# Altium PCB PCB1.PcbDoc
Units mil, origin at the board's own origin, x right, y up, seen from the top; angles counter-clockwise.
Board outline 885 x 605 mil, 2 copper layers (Top Layer, Bottom Layer); 2 components, 8 nets, 20 pads, 0 vias.
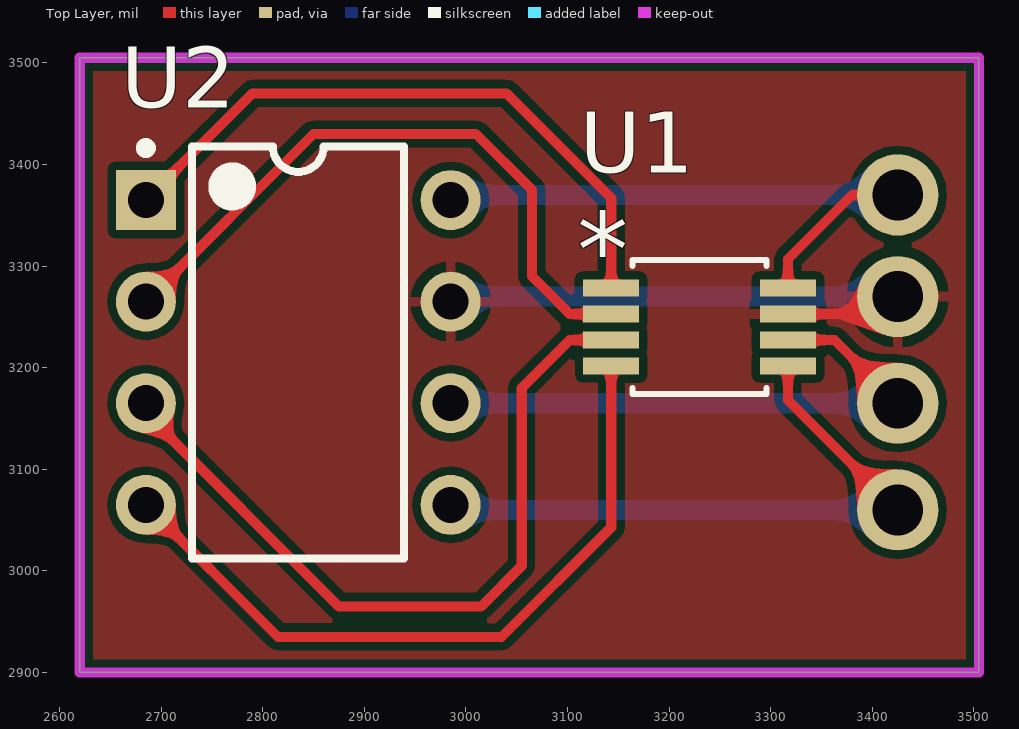
[diagram p0: Top Layer view]
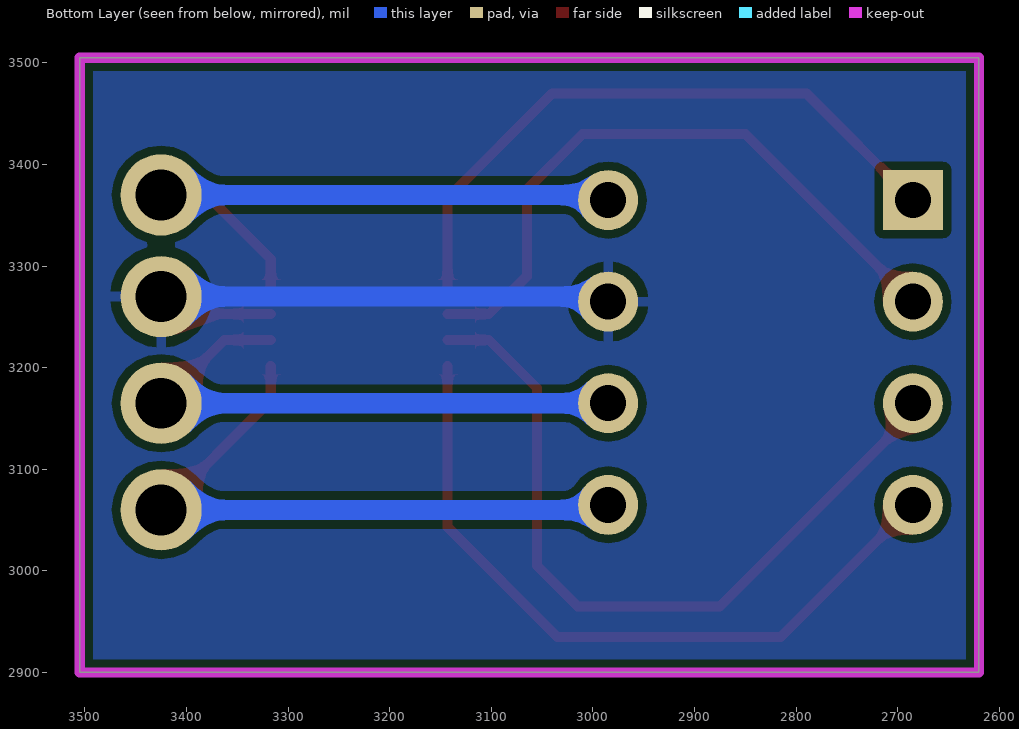
[diagram p1: Bottom Layer view, seen from below]

## Layer stack, top to bottom
Top Solder: solder mask 0.4, Solder Resist, Dk 3.5
Top Layer: signal copper 1.4
Dielectric 1: dielectric 12.6, FR-4, Dk 4.8
Bottom Layer: signal copper 1.4
Bottom Solder: solder mask 0.4, Solder Resist, Dk 3.5

## Board outline
2620,2900 3505,2900 3505,3505 2620,3505

## Design rules (kind name [scope] priority, off if disabled: settings)
Clearance [All] p1: gap=8 ignorepadtopadclearanceinfootprint=FALSE
ComponentClearance [All] p1: gap=0 collisioncheckmode=3 verticalgap=10 showdistances=FALSE
PolygonConnect [All] p1: connectstyle=Relief reliefconductorwidth=10 reliefentries=4 polygonreliefangle="90 Angle" airgapwidth=10
RoutingVias [All] p1: holewidth=28 width=50 viastyle="Through Hole" minholewidth=28 minwidth=50 maxholewidth=28 maxwidth=50
SolderMaskExpansion [All] p1: expansion=4
Width [All] p1: maxlimit=20 minlimit=10 preferedwidth=10
29 further rules are at their usual default settings.

## Components (designator, comment, footprint, x,y, rotation, side; value= is the part's Value field where it differs from the comment)
U1 "LTC2602CMS8TR" MSOP-8_MS 3230,3240 r0 top
U2 "LT1661" DIP-8 2835,3215 r0 top

## Footprints (in the part's own frame and the unit in brackets; to place one, negate y for a bottom-side part, rotate by r counter-clockwise, add the part's x,y. Pads: shape width x height; smd on the part's side, far side on the other; paste and mask are expansions set on the pad)
DIP-8 [mm]
  rect 1.5x1.5 hole 0.9: 1(-3.81,3.81)
  round 1.5 hole 0.9: 2(-3.81,1.27) 3(-3.81,-1.27) 4(-3.81,-3.81) 5(3.81,-3.81) 6(3.81,-1.27) 7(3.81,1.27) 8(3.81,3.81)
  silkscreen extent -3.93,-5.15 2.65,5.23, body extent -3.6,-5.15 3.6,5.15, height 5.08
MSOP-8_MS [mil]
  rect 55x17 smd: 1(-87,38.39) 2(-87,12.8) 3(-87,-12.8) 4(-87,-38.39) 5(87,-38.39) 6(87,-12.8) 7(87,12.8) 8(87,38.39)
  silkscreen extent -66,-66 66,66

## Part data
U1: "Ic Dac 16bit Dual r-r Vout 8msop", Package="MSOP-8 Linear Technology", Availability=Unavailable, MF="Linear Technology", MP=LTC2602CMS8#TR, Price=None

## Free pads (board coordinates)
  round 80 hole 50: 2(3425,3060) 2(3425,3165) 2(3425,3270) 2(3425,3370)

## Nets (pads, with @x,y where several pads share a name; then routed paths per layer and width w, separated by ;. In a path a pad name is that pad's centre, name@x,y a point inside that pad or via, vN(x,y) a via of type N, cw(c..) or ccw(c..) an arc to the next point about the centre after c; other vN are vias at no path point)
GND: pad.2@3425,3270 U1.7 U2.7 | length 557.2
  Top Layer w10: U1.7 3407.8,3252.8 pad.2@3425,3270
  Bottom Layer w10: U2.7 U2.7@2990,3270
  Bottom Layer w20: U2.7@2990,3270 pad.2@3425,3270
NetU1_1: U1.1 U2.1 | length 632.8
  Top Layer w10: U2.1 2790,3470 3040,3470 3143,3367 U1.1
NetU1_2: U1.2 U2.2 | length 649.5
  Top Layer w10: U2.2 2850,3430 3010,3430 3065,3375 3065,3290 3102.2,3252.8 U1.2
NetU1_3: U1.3 U2.3 | length 757.8
  Top Layer w10: U2.3 2685,3155 2875,2965 3015,2965 3055,3005 3055,3180 3102.2,3227.2 U1.3
NetU1_4: U1.4 U2.4 | length 715.2
  Top Layer w10: U2.4 2815,2935 3035,2935 3143,3043 U1.4
NetU1_5: pad.2@3425,3060 U1.5 U2.5 | length 621.3
  Top Layer w10: U1.5 3317,3168 pad.2@3425,3060
  Bottom Layer w20: U2.5@2990,3060 pad.2@3425,3060
NetU1_8: pad.2@3425,3370 U1.8 U2.8 | length 604.8
  Top Layer w10: U1.8 3317,3307 3380,3370 pad.2@3425,3370
  Bottom Layer w10: U2.8 U2.8@2990,3370
  Bottom Layer w20: U2.8@2990,3370 pad.2@3425,3370
VCC: pad.2@3425,3165 U1.6 U2.6 | length 573.8
  Top Layer w10: U1.6 3362.8,3227.2 pad.2@3425,3165
  Bottom Layer w20: U2.6 pad.2@3425,3165

## Polygon pours and split planes (outlines as drawn)
GND on Bottom Layer "GND BOT" (solid, pour order 2): 2620,3500 3505,3500 3505,2910 2620,2910
GND on Top Layer "GND TOP" (solid, pour order 0): 2620,3500 3505,3500 3505,2910 2620,2910

## Keep-outs
Keep-Out Layer:
  the board outline again, w10

## Text inside footprints (layer, text, board x,y; h text height)
U1: Top Overlay "*" at 3109.84,3280.22 h73.82; Mechanical 1 "*" at 3160.99,3238.16 h73.82